# Altium PCB iot_switch_V1.0.PcbDoc
Units mil, origin at the board's own origin, x right, y up, seen from the top; angles counter-clockwise.
Board outline 6000 x 4000 mil, 2 copper layers (Top Layer, Bottom Layer); 5 components, 3 nets, 64 pads, 0 vias.
Unrouted connection lines stored in the file: 3.
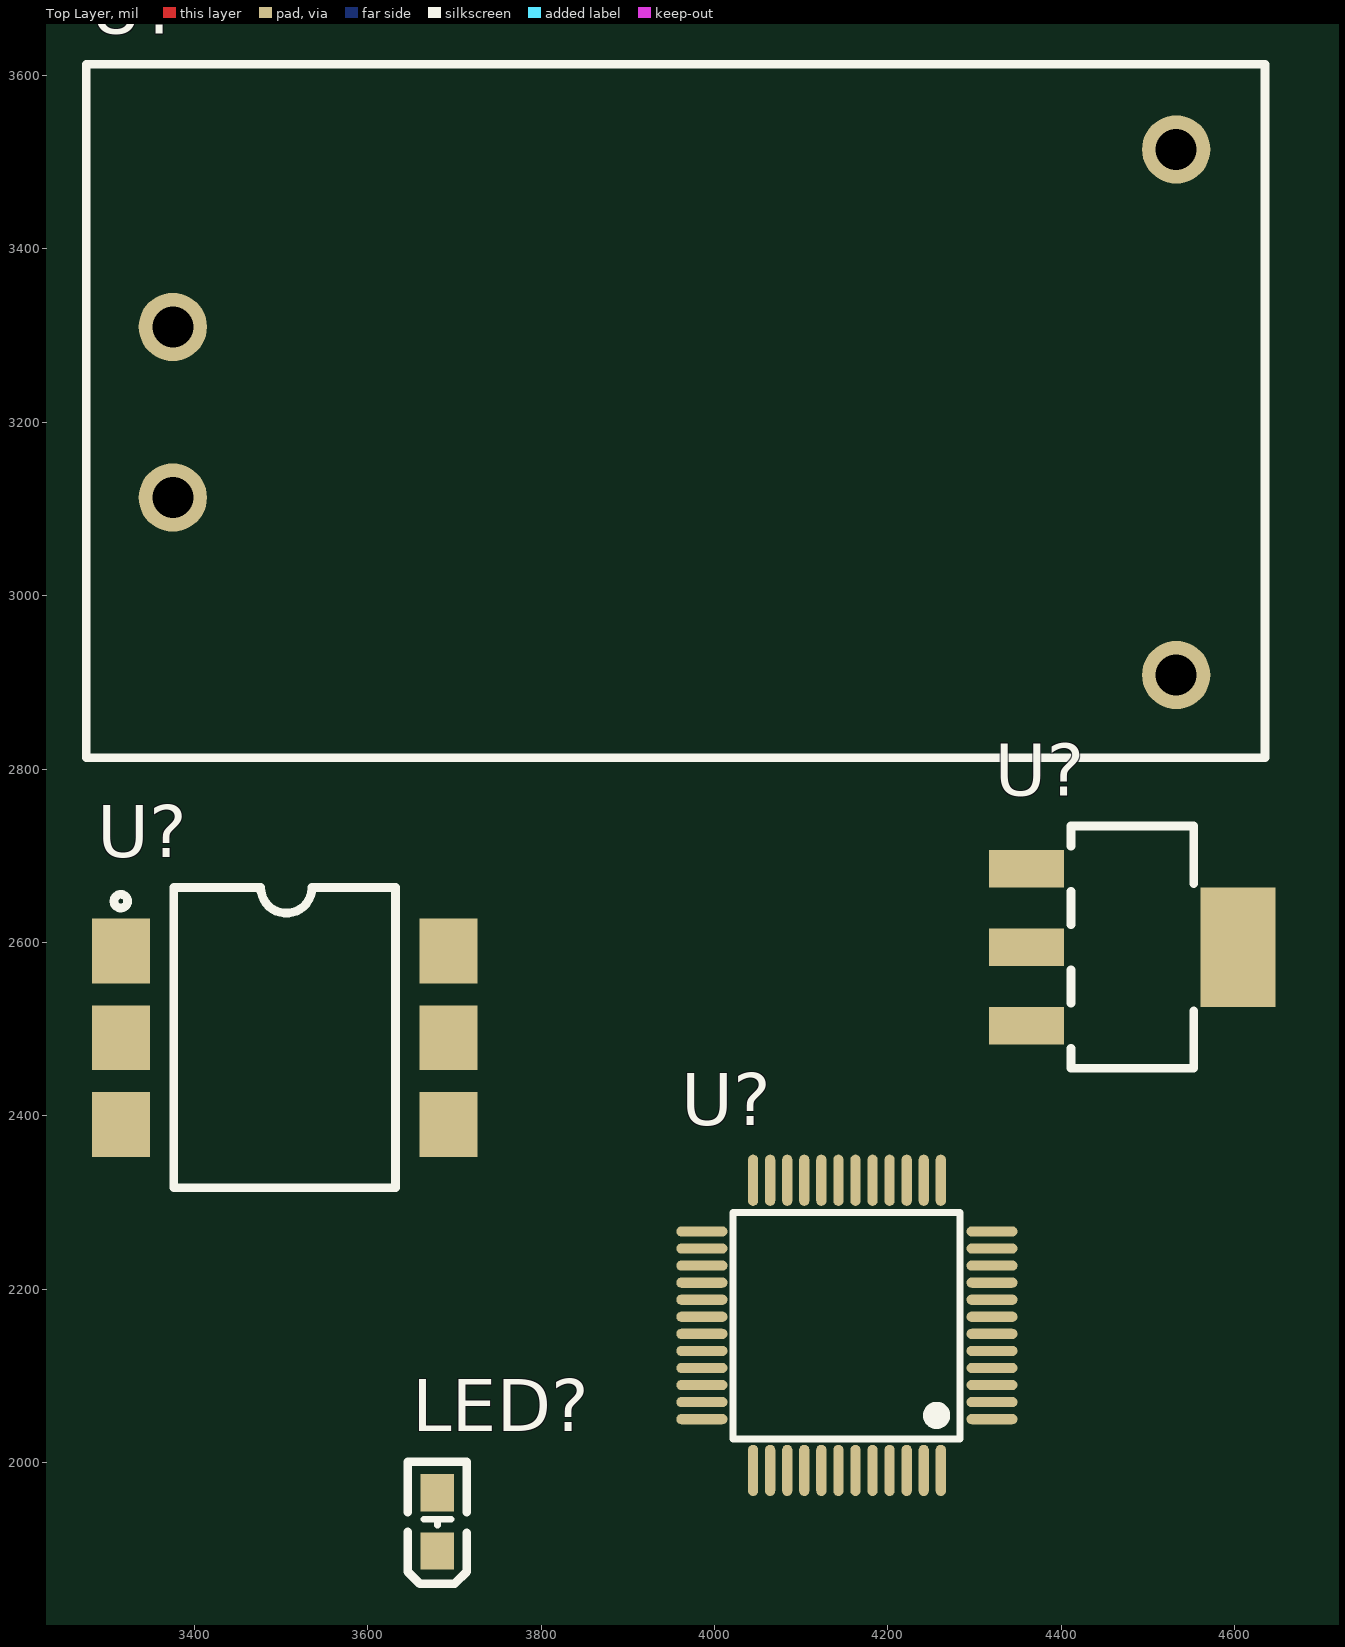
[diagram p0: Top Layer view]
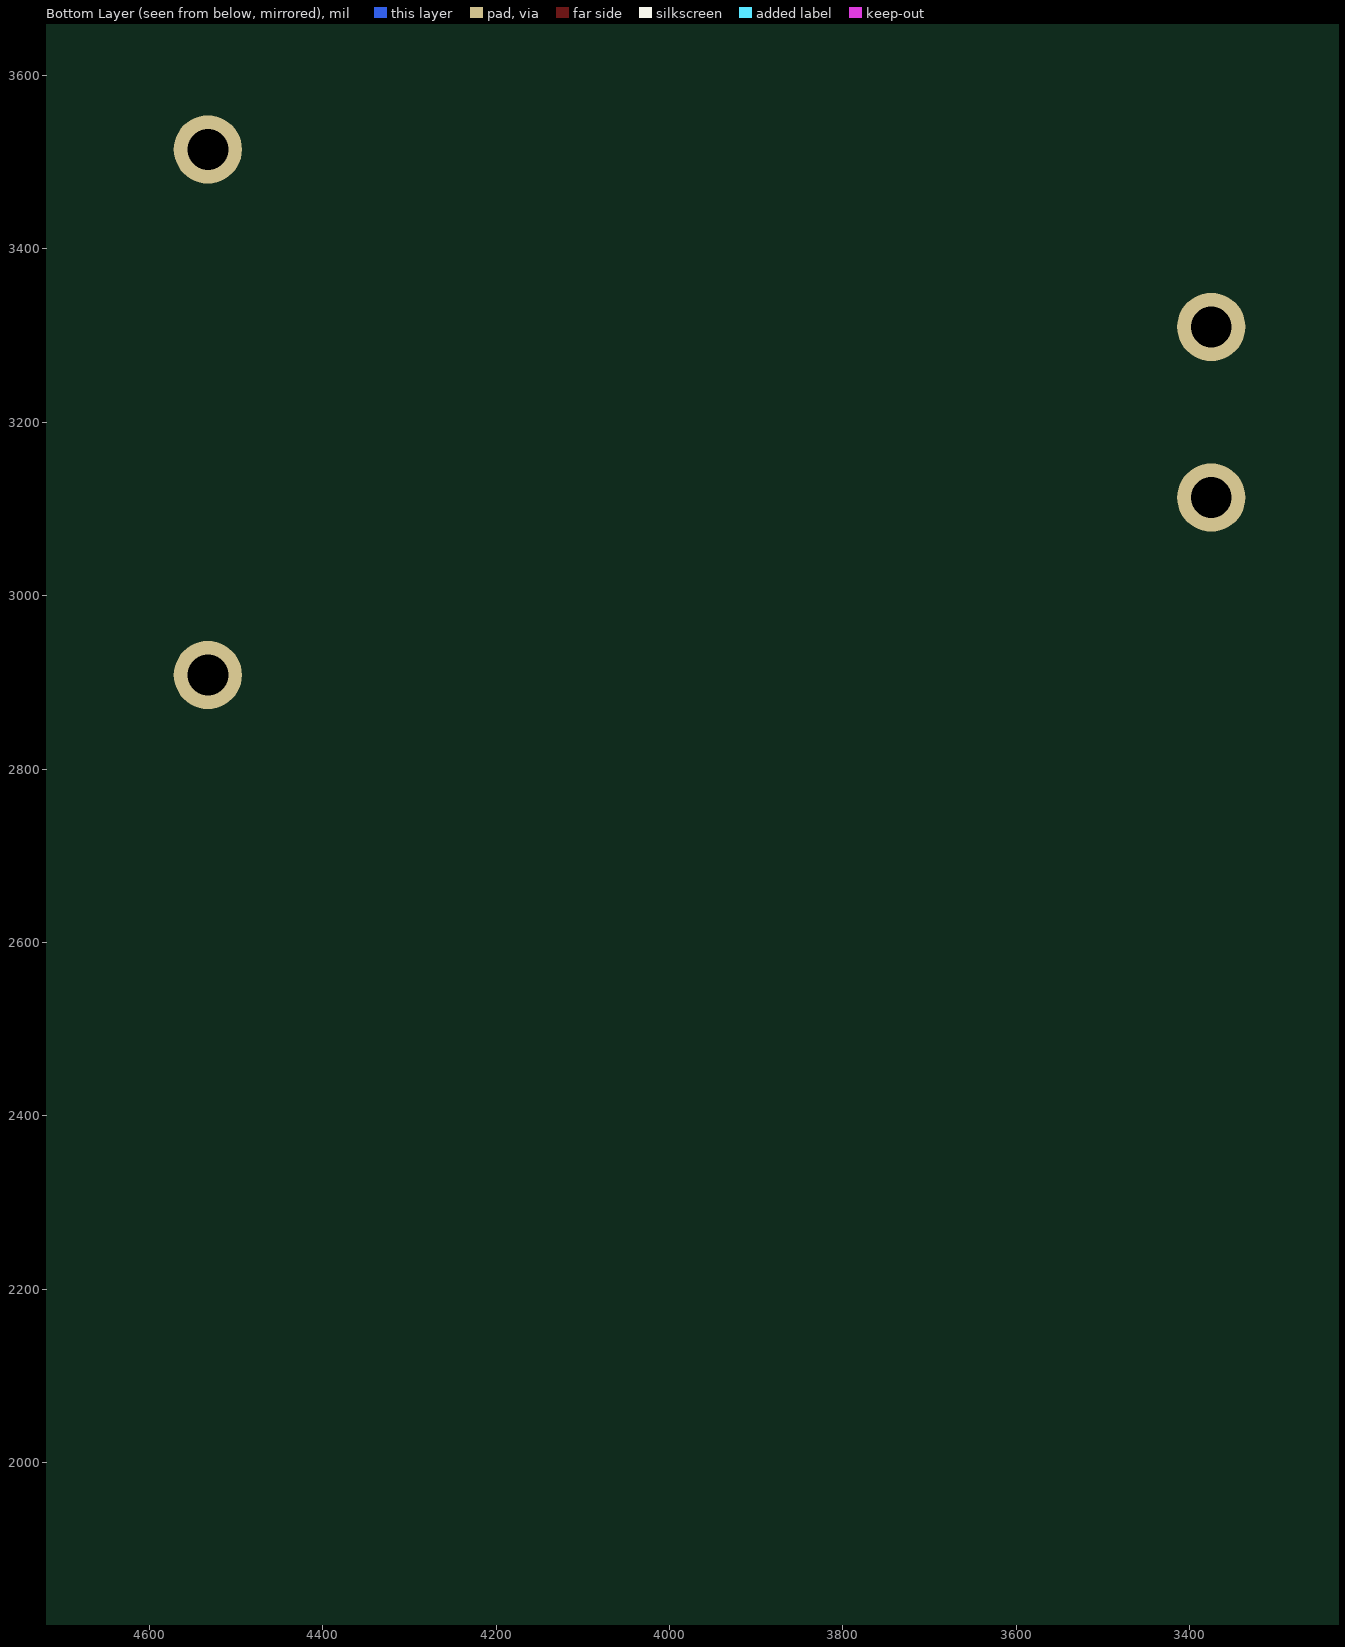
[diagram p1: Bottom Layer view, seen from below]

## Layer stack, top to bottom
Top Solder: solder mask 0.4, Solder Resist, Dk 3.5
Top Layer: signal copper 1.4
Dielectric 1: dielectric 12.6, FR-4, Dk 4.8
Bottom Layer: signal copper 1.4
Bottom Solder: solder mask 0.4, Solder Resist, Dk 3.5

## Board outline
1000,1000 7000,1000 7000,5000 1000,5000

## Design rules (kind name [scope] priority, off if disabled: settings)
Clearance [All] p1: gap=10
PolygonConnect [All] p1: connectstyle=Relief reliefconductorwidth=10 reliefentries=4 polygonreliefangle="90 Angle" airgapwidth=10
RoutingVias [All] p1: holewidth=28 width=50 viastyle="Through Hole" minholewidth=28 minwidth=50 maxholewidth=28 maxwidth=50
SolderMaskExpansion [All] p1: expansion=4
UnpouredPolygon [All] p1: allowunpoured=FALSE
Width [All] p1: maxlimit=10 minlimit=10 preferedwidth=10
29 further rules are at their usual default settings.

## Classes and differential pairs
component class Sheet1: LED? U?

## Components (designator, comment, footprint, x,y, rotation, side; value= is the part's Value field where it differs from the comment)
LED? "19-217/R6C-AL1M2VY/3T" LED0603-R-RD 3680,1965 r90 top
U? "AMS1117-3.3" SOT-223-3_L6.5-W3.4-P2.30-LS7.0-BR 4360,2685 r180 top
U? "STM32L051C8T6" LQFP-48_L7.0-W7.0-P0.50-LS9.0-BL 4320,2050 r90 top
U? "HLK-PM01" PWRM-TH_HLK-PM01 3375,3310 r0 top
U? "MOC3083SR2M" SMD-6_L8.7-W6.5-P2.54-LS10.6-BL 3315,2590 r270 top

## Footprints (in the part's own frame and the unit in brackets; to place one, negate y for a bottom-side part, rotate by r counter-clockwise, add the part's x,y. Pads: shape width x height; smd on the part's side, far side on the other; paste and mask are expansions set on the pad)
LED0603-R-RD [mil]
  rect 43x39 smd: 1(0,0) 2(-67,0)
  silkscreen extent -105,-34 36,34
LQFP-48_L7.0-W7.0-P0.50-LS9.0-BL [mm]
  oval 0.3x1.5 smd: 1(0,0) 2(0.5,0) 3(1,0) 4(1.5,0) 5(2,0) 6(2.5,0) 7(3,0) 8(3.5,0) 9(4,0) 10(4.5,0) 11(5,0) 12(5.5,0) 25(5.5,8.5) 26(5,8.5) 27(4.5,8.5) 28(4,8.5) 29(3.5,8.5) 30(3,8.5) 31(2.5,8.5) 32(2,8.5) 33(1.5,8.5) 34(1,8.5) 35(0.5,8.5) 36(0,8.5)
  oval 1.5x0.3 smd: 13(7,1.5) 14(7,2) 15(7,2.5) 16(7,3) 17(7,3.5) 18(7,4) 19(7,4.5) 20(7,5) 21(7,5.5) 22(7,6) 23(7,6.5) 24(7,7) 37(-1.5,7) 38(-1.5,6.5) 39(-1.5,6) 40(-1.5,5.5) 41(-1.5,5) 42(-1.5,4.5) 43(-1.5,4) 44(-1.5,3.5) 45(-1.5,3) 46(-1.5,2.5) 47(-1.5,2) 48(-1.5,1.5)
  silkscreen extent -0.58,0.94 6.05,7.59
PWRM-TH_HLK-PM01 [mm]
  round 2 hole 1.2: 1(0,0) 2(0,-5) 3(29.4,5.2) 4(29.4,-10.2)
  silkscreen extent -2.54,-12.62 32,7.7
SMD-6_L8.7-W6.5-P2.54-LS10.6-BL [mil]
  rect 74.8x66.93 smd: 1(0,0) 2(99.92,0) 3(199.92,0) 4(200,377.96) 5(99.92,377.95) 6(-0.08,377.95)
  silkscreen extent -73,-8 273,317
SOT-223-3_L6.5-W3.4-P2.30-LS7.0-BR [mm]
  rect 2.2x1.1 smd: 1(0,0) 2(0,2.3) 3(0,4.6)
  rect 2.2x3.5 smd: 4(-6.198,2.3)
  silkscreen extent -4.9,-1.25 -1.3,5.85

## Nets (pads, with @x,y where several pads share a name; then routed paths per layer and width w, separated by ;. In a path a pad name is that pad's centre, name@x,y a point inside that pad or via, vN(x,y) a via of type N, cw(c..) or ccw(c..) an arc to the next point about the centre after c; other vN are vias at no path point)
GND: U?.1@4360,2685 U?.3@4532.48,3514.72
VCC_3.3V: U?.2@4360,2594.45 U?.4@4604,2594.45
VCC_5V: U?.3@4360,2503.9 U?.4@4532.48,2908.43
pads on no net: LED?.1 LED?.2 U?.1@3315,2590 U?.1@3375,3310 U?.1@4320,2050 U?.2@3315,2490.08 U?.2@3375,3113.15 U?.2@4320,2069.68 U?.3@3315,2390.08 U?.3@4320,2089.37 U?.4@3692.96,2390 U?.4@4320,2109.05 U?.5 U?.6 U?.7 U?.8 U?.9 U?.10 U?.11 U?.12 U?.13 U?.14 U?.15 U?.16 U?.17 U?.18 U?.19 U?.20 U?.21 U?.22 U?.23 U?.24 U?.25 U?.26 U?.27 U?.28 U?.29 U?.30 U?.31 U?.32 U?.33 U?.34 U?.35 U?.36 U?.37 U?.38 U?.39 U?.40 U?.41 U?.42 U?.43 U?.44 U?.45 U?.46 U?.47 U?.48